# Altium PCB Copy of ProtoStack_H750VBT.PcbDoc
Units mil, origin at the board's own origin, x right, y up, seen from the top; angles counter-clockwise.
Board outline 1259.84 x 4409.45 mil, 3 copper layers (Top Layer, Mid-Layer 2, Bottom Layer); 3 components, 86 nets, 186 pads, 36 vias.
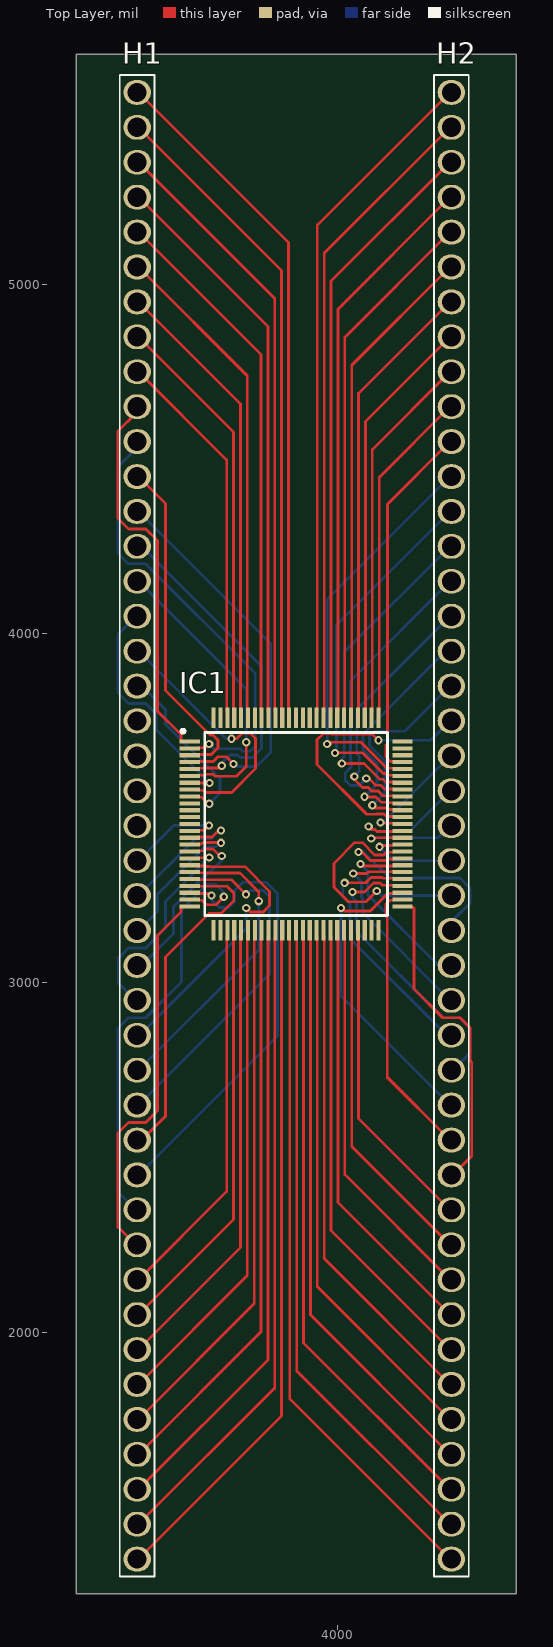
[diagram p0: Top Layer view]
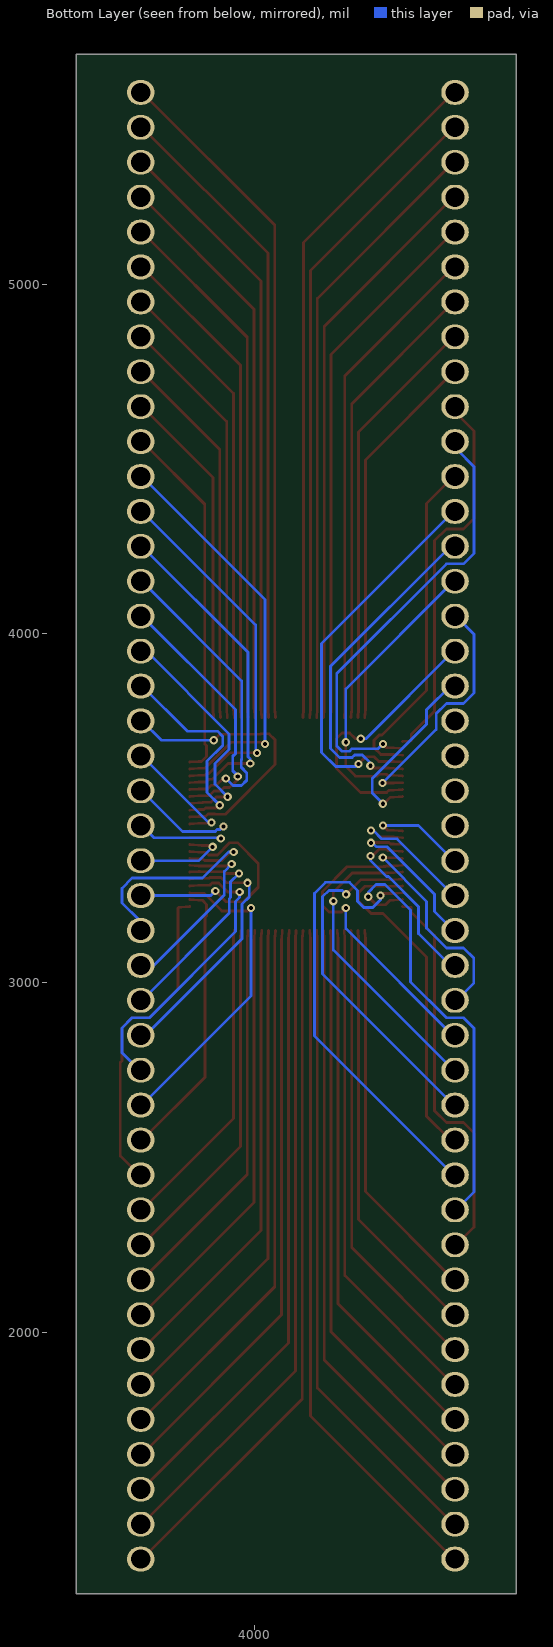
[diagram p1: Bottom Layer view, seen from below]

## Layer stack, top to bottom
Top Solder: solder mask 0.4, Solder Resist, Dk 3.5
Top Layer: signal copper 1.4
Dielectric 1: dielectric 12.6, FR-4, Dk 4.8
Mid-Layer 2: signal copper 1.4
Dielectric2: dielectric 12.6, FR-4, Dk 4.8
Bottom Layer: signal copper 1.4
Bottom Solder: solder mask 0.4, Solder Resist, Dk 3.5

## Board outline
3250.25,1250.25 3250.25,5659.7 4510.09,5659.7 4510.09,1250.25

## Design rules (kind name [scope] priority, off if disabled: settings)
Clearance [All] p1: gap=7 ignorepadtopadclearanceinfootprint=TRUE
PolygonConnect [All] p1: connectstyle=Relief reliefconductorwidth=10 reliefentries=4 polygonreliefangle="90 Angle" airgapwidth=10
RoutingVias [All] p1: holewidth=11.81 width=23.62 viastyle="Through Hole" minholewidth=11.81 minwidth=23.62 maxholewidth=11.81 maxwidth=23.62
SolderMaskExpansion [All] p1: expansion=4 istentingtop=FALSE
Width [All] p1: maxlimit=8 minlimit=8 preferedwidth=8
30 further rules are at their usual default settings.

## Components (designator, comment, footprint, x,y, rotation, side; value= is the part's Value field where it differs from the comment)
H1 "RoundedHeader" HeaderDtack_43 3425,5550 r270 top
H2 "RoundedHeader" HeaderDtack_43 4325,5550 r270 top
IC1 "STM32H750VBT6" QFP50P1600X1600X160-100N 3880.17,3454.97 r0 top

## Footprints (in the part's own frame and the unit in brackets; to place one, negate y for a bottom-side part, rotate by r counter-clockwise, add the part's x,y. Pads: shape width x height; smd on the part's side, far side on the other; paste and mask are expansions set on the pad)
HeaderDtack_43 [mm]
  oval 1.8x2 hole 1.4: 1(0,0) 2(2.54,0) 3(5.08,0) 4(7.62,0) 5(10.16,0) 6(12.7,0) 7(15.24,0) 8(17.78,0) 9(20.32,0) 10(22.86,0) 11(25.4,0) 12(27.94,0) 13(30.48,0) 14(33.02,0) 15(35.56,0) 16(38.1,0) 17(40.64,0) 18(43.18,0) 19(45.72,0) 20(48.26,0) 21(50.8,0) 22(53.34,0) 23(55.88,0) 24(58.42,0) 25(60.96,0) 26(63.5,0) 27(66.04,0) 28(68.58,0) 29(71.12,0) 30(73.66,0) 31(76.2,0) 32(78.74,0) 33(81.28,0) 34(83.82,0) 35(86.36,0) 36(88.9,0) 37(91.44,0) 38(93.98,0) 39(96.52,0) 40(99.06,0) 41(101.6,0) 42(104.14,0) 43(106.68,0)
  silkscreen extent -1.27,-1.27 107.95,1.27
QFP50P1600X1600X160-100N [mm]
  rect 1.475x0.3 smd: 1(-7.738,6) 2(-7.738,5.5) 3(-7.738,5) 4(-7.738,4.5) 5(-7.738,4) 6(-7.738,3.5) 7(-7.738,3) 8(-7.738,2.5) 9(-7.738,2) 10(-7.738,1.5) 11(-7.738,1) 12(-7.738,0.5) 13(-7.738,0) 14(-7.738,-0.5) 15(-7.738,-1) 16(-7.738,-1.5) 17(-7.738,-2) 18(-7.738,-2.5) 19(-7.738,-3) 20(-7.738,-3.5) 21(-7.738,-4) 22(-7.738,-4.5) 23(-7.738,-5) 24(-7.738,-5.5) 25(-7.738,-6) 51(7.738,-6) 52(7.738,-5.5) 53(7.738,-5) 54(7.738,-4.5) 55(7.738,-4) 56(7.738,-3.5) 57(7.738,-3) 58(7.738,-2.5) 59(7.738,-2) 60(7.738,-1.5) 61(7.738,-1) 62(7.738,-0.5) 63(7.738,0) 64(7.738,0.5) 65(7.738,1) 66(7.738,1.5) 67(7.738,2) 68(7.738,2.5) 69(7.738,3) 70(7.738,3.5) 71(7.738,4) 72(7.738,4.5) 73(7.738,5) 74(7.738,5.5) 75(7.738,6)
  rect 0.3x1.475 smd: 26(-6,-7.738) 27(-5.5,-7.738) 28(-5,-7.738) 29(-4.5,-7.738) 30(-4,-7.738) 31(-3.5,-7.738) 32(-3,-7.738) 33(-2.5,-7.738) 34(-2,-7.738) 35(-1.5,-7.738) 36(-1,-7.738) 37(-0.5,-7.738) 38(0,-7.738) 39(0.5,-7.738) 40(1,-7.738) 41(1.5,-7.738) 42(2,-7.738) 43(2.5,-7.738) 44(3,-7.738) 45(3.5,-7.738) 46(4,-7.738) 47(4.5,-7.738) 48(5,-7.738) 49(5.5,-7.738) 50(6,-7.738) 76(6,7.738) 77(5.5,7.738) 78(5,7.738) 79(4.5,7.738) 80(4,7.738) 81(3.5,7.738) 82(3,7.738) 83(2.5,7.738) 84(2,7.738) 85(1.5,7.738) 86(1,7.738) 87(0.5,7.738) 88(0,7.738) 89(-0.5,7.738) 90(-1,7.738) 91(-1.5,7.738) 92(-2,7.738) 93(-2.5,7.738) 94(-3,7.738) 95(-3.5,7.738) 96(-4,7.738) 97(-4.5,7.738) 98(-5,7.738) 99(-5.5,7.738) 100(-6,7.738)
  silkscreen extent -8.35,-6.65 6.65,6.87, body extent -8,-8 8,8, height 1.6

## Part data
H1 H2: library part HeaderStack_43
IC1: "Integrated Circuit", Manufacturer_Name=STMicroelectronics, Mouser Part Number=511-STM32H750VBT6, Arrow Part Number=STM32H750VBT6, Arrow Price/Stock=https://www.arrow.com/en/products/stm32h750vbt6/stmicroelectronics?region=nac, Datasheet Link=https://www.st.com/resource/en/datasheet/stm32h750vb.pdf, Height=1.6mm, Manufacturer_Part_Number=STM32H750VBT6, Mouser Price/Stock=https://www.mouser.co.uk/ProductDetail/STMicroelectronics/STM32H750VBT6?qs=%252BEew9%252B0nqrBAeuu%2FsQQSzQ%3D%3D

## Via types
v1: diameter 23.62, hole 11.81, Top Layer to Bottom Layer, 36 vias

## Nets (pads, with @x,y where several pads share a name; then routed paths per layer and width w, separated by ;. In a path a pad name is that pad's centre, name@x,y a point inside that pad or via, vN(x,y) a via of type N, cw(c..) or ccw(c..) an arc to the next point about the centre after c; other vN are vias at no path point)
NetC1_1: IC1.73
NetC2_2: 
NetC3_2: 
NetC4_2: IC1.48
NetH1_1: H1.1 IC1.89 | length 1972.4
  Top Layer w8: H1.1 3428.94,5550 3858.58,5120.35 3858.58,3788.65 3858.58,3784.65 IC1.89
NetH1_2: H1.2 IC1.90 | length 1864.2
  Top Layer w8: H1.2 3428.94,5450 3838.9,5040.04 3838.9,3788.65 3838.9,3784.65 IC1.90
NetH1_3: H1.3 IC1.91 | length 1756
  Top Layer w8: H1.3 3428.94,5350 3819.21,4959.72 3819.21,3788.65 3819.21,3784.65 IC1.91
NetH1_4: H1.4 IC1.92 | length 1647.9
  Top Layer w8: H1.4 3428.94,5250 3799.53,4879.41 3799.53,3788.65 3799.53,3784.65 IC1.92
NetH1_5: H1.5 IC1.93 | length 1539.7
  Top Layer w8: H1.5 3428.94,5150 3779.84,4799.09 3779.84,3788.65 3779.84,3784.65 IC1.93
NetH1_6: H1.6 IC1.95 | length 1423.4
  Top Layer w8: H1.6 3428.94,5050 3740.47,4738.46 3740.47,3788.65 3740.47,3784.65 IC1.95
NetH1_7: H1.7 IC1.96 | length 1315.3
  Top Layer w8: H1.7 3428.94,4950 3720.79,4658.15 3720.79,3788.65 3720.79,3784.65 IC1.96
NetH1_8: H1.8 IC1.97 | length 1207.1
  Top Layer w8: H1.8 3428.94,4850 3701.1,4577.83 3701.1,3788.65 3701.1,3784.65 IC1.97
NetH1_9: H1.9 IC1.98 | length 1099
  Top Layer w8: H1.9 3428.94,4750 3681.42,4497.52 3681.42,3788.65 3681.42,3784.65 IC1.98
NetH1_10: H1.10 IC1.1 | length 1110.3
  Top Layer w8: 3370.57,4401.68 3370.57,4477.92 ; 3370.57,4501.68 3370.57,4580.42 3421.06,4630.91 3421.06,4650 H1.10 ; 3370.59,4401.67 3370.59,4329.76 3400.35,4300 3449.65,4300 3483.37,4266.28 3483.37,3777.85 3550.49,3710.73 3550.49,3697.1 3550.49,3693.1 IC1.1 ; 3370.59,4477.93 3370.59,4501.67
NetH1_11: H1.11 IC1.2 | length 1295.5
  Top Layer w8: IC1.2 3600.56,3673.41 3604.56,3673.41 3620.58,3673.41 v1(3631.24,3684.07)
  Bottom Layer w8: 3370.57,4328.3 3370.57,4375.42 ; 3370.57,4401.68 3370.57,4477.92 3421.06,4528.41 3421.06,4550 H1.11 ; 3370.59,4328.28 3370.59,4229.76 3400.35,4200 3449.65,4200 3763.56,3886.09 3763.56,3678.46 3748.39,3663.3 3726.95,3663.3 3719.58,3670.66 3644.65,3670.66 v1(3631.24,3684.07) ; 3370.59,4375.44 3370.59,4401.67
NetH1_12: H1.12 IC1.3 | length 969.6
  Top Layer w8: H1.12 3428.94,4450 3506.37,4372.57 3506.37,3837.31 3633.79,3709.89 3641.93,3709.89 3657.06,3694.76 3657.06,3673.38 3637.41,3653.73 3604.56,3653.73 3600.56,3653.73 IC1.3
NetH1_13: H1.13 IC1.4 | length 1116.8
  Top Layer w8: IC1.4 3600.56,3634.04 3604.56,3634.04 3643.18,3634.04 3656.74,3647.6 3680.48,3647.6 v1(3701.37,3626.7)
  Bottom Layer w8: H1.13 3428.94,4350 3807.52,3971.42 3807.52,3660.25 3766.6,3619.34 3708.74,3619.34 v1(3701.37,3626.7)
NetH1_14: H1.14 IC1.5 | length 974.8
  Top Layer w8: IC1.5 3600.56,3614.36 3604.56,3614.36 3614.2,3614.36 3614.78,3614.94 3660.59,3614.94 v1(3667.43,3621.79)
  Bottom Layer w8: H1.14 3428.94,4250 3438.44,4250 3781.63,3906.82 3781.63,3670.97 3755.88,3645.22 3719.46,3645.22 3712.09,3652.59 3690.65,3652.59 3667.43,3629.37 v1(3667.43,3621.79)
NetH1_15: H1.15 IC1.6 | length 839.5
  Top Layer w8: IC1.6 3600.56,3594.67 3604.56,3594.67 3619.15,3594.67 3622,3597.52 3642.7,3597.52 3648.25,3591.97 3710.22,3591.97 3737.67,3619.43 v1(3737.67,3689.18)
  Bottom Layer w8: H1.15 3428.94,4150 3737.67,3841.26 v1(3737.67,3689.18)
NetH1_16: H1.16 IC1.7 | length 696.4
  Top Layer w8: IC1.7 3600.56,3572.54 3604.56,3572.54 v1(3632.35,3572.54)
  Bottom Layer w8: 3370.57,3918.3 3370.57,3998.32 3421.06,4048.81 3421.06,4050 H1.16 ; 3370.59,3918.28 3370.59,3829.76 3400.35,3800 3449.65,3800 3478.94,3770.71 3478.94,3725.95 v1(3632.35,3572.54)
NetH1_17: H1.17 IC1.8 | length 763.1
  Top Layer w8: IC1.8 3600.56,3551.49 3604.56,3551.49 3614.37,3551.49 3620.69,3545.17 3695.94,3545.17 3764.28,3613.51 3764.28,3700.2 3748.69,3715.79 3726.65,3715.79 3709.82,3698.95 v1(3695.02,3698.95)
  Bottom Layer w8: H1.17 3428.94,3950 3679.99,3698.95 v1(3695.02,3698.95)
NetH1_18: H1.18 IC1.9 | length 520
  Top Layer w8: IC1.9 3600.56,3531.81 3604.56,3531.81 3609.48,3531.81 3628.5,3512.79 v1(3631.67,3512.79)
  Bottom Layer w8: H1.18 3428.94,3850 3438.44,3850 3506.37,3782.07 3506.37,3740.68 3662.16,3584.89 3662.16,3543.29 v1(3631.67,3512.79)
NetH1_23: H1.23 IC1.14 | length 309.4
  Top Layer w8: IC1.14 3600.56,3437.19 3604.56,3437.19 3617.52,3437.19 v1(3631.2,3450.88)
  Bottom Layer w8: H1.23 3428.94,3350 3529.82,3450.88 v1(3631.2,3450.88)
NetH1_24: H1.24 IC1.15 | length 415.1
  Top Layer w8: IC1.15 3600.56,3417.51 3604.56,3417.51 3639.91,3417.51 3658.82,3436.43 v1(3665.25,3436.43)
  Bottom Layer w8: H1.24 3428.94,3250 3591.49,3412.55 3634.95,3412.55 3658.82,3436.43 v1(3665.25,3436.43)
NetH1_25: H1.25 IC1.16 | length 465.6
  Top Layer w8: IC1.16 3600.56,3397.82 3604.56,3397.82 3609.49,3397.82 3613.75,3402.09 3664.31,3402.09 v1(3665.43,3400.96)
  Bottom Layer w8: H1.25 3428.94,3150 3483.37,3204.43 3483.37,3253.98 3618.94,3389.55 3649.77,3389.55 3661.18,3400.96 v1(3665.43,3400.96)
NetH1_26: H1.26 IC1.17 | length 526.8
  Top Layer w8: IC1.17 3600.56,3378.14 3604.56,3378.14 3616.24,3378.14 3621.49,3383.39 3641.92,3383.39 3661.89,3363.42 v1(3667.21,3363.42)
  Bottom Layer w8: H1.26 3428.94,3050 3438.44,3050 3529.37,3140.93 3529.37,3217.91 3615.8,3304.34 3620.88,3304.34 3667.21,3350.67 v1(3667.21,3363.42)
NetH1_27: H1.27 IC1.18 | length 626.6
  Top Layer w8: IC1.18@3575.53,3356.55 3600.56,3358.45 3604.56,3358.45 3631.42,3358.45 v1(3631.7,3358.74)
  Bottom Layer w8: H1.27 3421.06,2950 3371.06,3000 3371.06,3070.71 3400.35,3100 3449.65,3100 3506.37,3156.72 3506.37,3233.41 v1(3631.7,3358.74)
NetH1_28: H1.28 IC1.19 | length 876.9
  Top Layer w8: IC1.19 3600.56,3334.96 3604.56,3334.96 3622.53,3334.96 3624.29,3333.2 3629.95,3333.2 3630.39,3332.76 3733.56,3332.76 3804.28,3262.04 3804.28,3221.33 3786.23,3203.29 3748.99,3203.29 v1(3737.66,3214.62)
  Bottom Layer w8: H1.28 3428.94,2850 3432.17,2850 3737.66,3155.48 v1(3737.66,3214.62)
NetH1_29: H1.29 IC1.20 | length 877.7
  Top Layer w8: IC1.20 3600.56,3315.27 3604.56,3315.27 3617.63,3315.27 3618.32,3314.59 3719.2,3314.59 3773.47,3260.32 v1(3773.47,3234.1)
  Bottom Layer w8: H1.29 3428.94,2750 3773.47,3094.53 v1(3773.47,3234.1)
NetH1_30: H1.30 IC1.21 | length 1014.7
  Top Layer w8: IC1.21 3600.56,3295.59 3604.56,3295.59 3694.63,3295.59 v1(3736.63,3253.59)
  Bottom Layer w8: H1.30 3428.94,2650 3804.28,3025.34 3804.28,3246.86 3786.23,3264.91 3747.95,3264.91 v1(3736.63,3253.59)
NetH1_31: H1.31 IC1.22 | length 984.2
  Top Layer w8: H1.31 3428.94,2550 3438.44,2550 3506.37,2617.93 3506.37,3073.78 3630.95,3198.36 3664.97,3198.36 3701.47,3234.86 3701.47,3258.11 3682.73,3276.86 3604.56,3276.86 3600.56,3276.86 IC1.22
NetH1_32: H1.32 IC1.23 | length 1312.3
  Top Layer w8: IC1.23 3600.56,3256.22 3604.56,3256.22 3632.39,3256.22 v1(3638.08,3250.53)
  Bottom Layer w8: H1.32 3428.94,2450 3827.28,2848.34 3827.28,3256.39 3795.76,3287.91 3727.38,3287.91 3704.21,3264.74 3704.21,3233.72 3686.17,3215.68 3660.64,3215.68 3638.08,3238.23 v1(3638.08,3250.53)
NetH1_33: H1.33 IC1.24 | length 1273.1
  Top Layer w8: IC1.24 3600.56,3236.53 3604.56,3236.53 3611.14,3236.53 3624.04,3223.63 3650.54,3223.63 v1(3673.4,3246.49)
  Bottom Layer w8: 3370.57,2479.09 3370.57,2401.68 3421.06,2351.19 3421.06,2350 H1.33 ; 3370.57,2501.68 3370.57,2581.59 ; 3370.57,2601.68 3370.57,2684.1 ; 3370.57,2701.68 3370.57,2786.6 ; 3370.59,2479.11 3370.59,2501.67 ; 3370.59,2581.61 3370.59,2601.67 ; 3370.59,2684.11 3370.59,2701.67 ; 3370.59,2786.62 3370.59,2870.24 3400.35,2900 3449.65,2900 3552.37,3002.72 3552.37,3208.39 3625.32,3281.34 3650.85,3281.34 3673.4,3258.78 v1(3673.4,3246.49)
NetH1_34: H1.34 IC1.25 | length 1120.2
  Top Layer w8: 3370.57,2376.59 3370.57,2300.49 3421.06,2250 H1.34 ; 3370.57,2401.68 3370.57,2479.09 ; 3370.59,2376.6 3370.59,2401.67 ; 3370.59,2479.11 3370.59,2570.24 3400.35,2600 3449.65,2600 3483.37,2633.72 3483.37,3136.17 3550.49,3203.29 3550.49,3212.85 3550.49,3216.85 IC1.25
NetH1_35: H1.35 IC1.28 | length 1108.9
  Top Layer w8: H1.35 3428.94,2150 3681.42,2402.48 3681.42,3121.29 3681.42,3125.29 IC1.28
NetH1_36: H1.36 IC1.29 | length 1217.1
  Top Layer w8: H1.36 3428.94,2050 3701.1,2322.17 3701.1,3121.29 3701.1,3125.29 IC1.29
NetH1_37: H1.37 IC1.30 | length 1325.2
  Top Layer w8: H1.37 3428.94,1950 3720.79,2241.85 3720.79,3121.29 3720.79,3125.29 IC1.30
NetH1_38: H1.38 IC1.31 | length 1433.4
  Top Layer w8: H1.38 3428.94,1850 3740.47,2161.54 3740.47,3121.29 3740.47,3125.29 IC1.31
NetH1_39: H1.39 IC1.32 | length 1541.5
  Top Layer w8: H1.39 3428.94,1750 3760.16,2081.22 3760.16,3121.29 3760.16,3125.29 IC1.32
NetH1_40: H1.40 IC1.33 | length 1649.7
  Top Layer w8: H1.40 3428.94,1650 3779.84,2000.91 3779.84,3121.29 3779.84,3125.29 IC1.33
NetH1_41: H1.41 IC1.34 | length 1757.8
  Top Layer w8: H1.41 3428.94,1550 3799.53,1920.59 3799.53,3121.29 3799.53,3125.29 IC1.34
NetH1_42: H1.42 IC1.35 | length 1866
  Top Layer w8: H1.42 3428.94,1450 3819.21,1840.28 3819.21,3121.29 3819.21,3125.29 IC1.35
NetH1_43: H1.43 IC1.36 | length 1974.1
  Top Layer w8: H1.43 3428.94,1350 3838.9,1759.96 3838.9,3121.29 3838.9,3125.29 IC1.36
NetH2_1: H2.1 IC1.85 | length 1951.8
  Top Layer w8: IC1.85 3941.13,3784.65 3941.13,3788.65 3941.13,5170.07 4321.06,5550 H2.1
NetH2_2: H2.2 IC1.84 | length 1843.6
  Top Layer w8: IC1.84 3960.82,3784.65 3960.82,3788.65 3960.82,5089.76 4321.06,5450 H2.2
NetH2_3: H2.3 IC1.83 | length 1735.5
  Top Layer w8: IC1.83 3980.5,3784.65 3980.5,3788.65 3980.5,5009.44 4321.06,5350 H2.3
NetH2_4: H2.4 IC1.82 | length 1627.3
  Top Layer w8: IC1.82 4000.19,3784.65 4000.19,3788.65 4000.19,4929.13 4321.06,5250 H2.4
NetH2_5: H2.5 IC1.81 | length 1519.1
  Top Layer w8: IC1.81 4019.87,3784.65 4019.87,3788.65 4019.87,4848.81 4321.06,5150 H2.5
NetH2_6: H2.6 IC1.80 | length 1411
  Top Layer w8: IC1.80 4039.56,3784.65 4039.56,3788.65 4039.56,4768.5 4321.06,5050 H2.6
NetH2_7: H2.7 IC1.79 | length 1302.8
  Top Layer w8: IC1.79 4059.24,3784.65 4059.24,3788.65 4059.24,4688.18 4321.06,4950 H2.7
NetH2_8: H2.8 IC1.78 | length 1194.7
  Top Layer w8: IC1.78 4078.93,3784.65 4078.93,3788.65 4078.93,4607.87 4321.06,4850 H2.8
NetH2_9: H2.9 IC1.77 | length 1086.5
  Top Layer w8: IC1.77 4098.61,3784.65 4098.61,3788.65 4098.61,4527.55 4321.06,4750 H2.9
NetH2_10: H2.10 IC1.76 | length 978.4
  Top Layer w8: IC1.76 4118.3,3784.65 4118.3,3788.65 4118.3,4447.24 4321.06,4650 H2.10
NetH2_11: H2.11 IC1.72 | length 1036.1
  Top Layer w8: IC1.72 4159.78,3634.04 4155.78,3634.04 4150.87,3634.04 4136.78,3648.13 4136.78,3679.22 4141.78,3684.22 4141.78,4370.72 4321.06,4550 H2.11
NetH2_12: H2.12 IC1.71 | length 1164.2
  Top Layer w8: v1(3969.27,3684.06) 3974.17,3688.95 4066.39,3688.95 4140.8,3614.55 4142.52,3614.55 4142.71,3614.36 4155.78,3614.36 4159.78,3614.36 IC1.71
  Bottom Layer w8: v1(3969.27,3684.06) 3969.27,4098.2 4321.06,4450 H2.12
NetH2_13: H2.13 IC1.70 | length 1051.7
  Top Layer w8: v1(3992.01,3658.33) 3992.65,3658.96 4070.37,3658.96 4129.72,3599.62 4136.33,3599.62 4141.28,3594.67 4155.78,3594.67 4159.78,3594.67 IC1.70
  Bottom Layer w8: v1(3992.01,3658.33) 3995.8,3662.12 3995.8,4024.74 4321.06,4350 H2.13
NetH2_14: H2.14 IC1.69 | length 949.8
  Top Layer w8: v1(4011.25,3628.15) 4075.18,3628.15 4120.45,3582.88 4129.4,3582.88 4137.3,3574.99 4155.78,3574.99 4159.78,3574.99 IC1.69
  Bottom Layer w8: v1(4011.25,3628.15) 4011.25,3640.99 4017.88,3647.61 4017.88,3946.82 4321.06,4250 H2.14
NetH2_15: H2.15 IC1.68 | length 889.6
  Top Layer w8: v1(4081.22,3585.05) 4088.7,3585.05 4107.61,3566.15 4122.47,3566.15 4133.31,3555.3 4155.78,3555.3 4159.78,3555.3 IC1.68
  Bottom Layer w8: v1(4081.22,3585.05) 4061.14,3564.96 4036.35,3564.96 4021.2,3580.11 4021.2,3601.54 4037.11,3617.44 4037.11,3638.86 4035.94,3640.04 4035.94,3864.87 4321.06,4150 H2.15
NetH2_16: H2.16 IC1.67 | length 748.3
  Top Layer w8: v1(4047.06,3590.82) 4047.06,3582.49 4070.47,3559.09 4086.89,3559.09 4096.57,3549.41 4115.54,3549.41 4129.33,3535.62 4155.78,3535.62 4159.78,3535.62 IC1.67
  Bottom Layer w8: v1(4047.06,3590.82) 4047.06,3593.15 4061.32,3607.41 4061.32,3648.89 4053.99,3656.22 4053.99,3782.93 4321.06,4050 H2.16
NetH2_17: H2.17 IC1.66 | length 678.4
  Top Layer w8: v1(4076.13,3533.13) 4076.58,3532.68 4108.61,3532.68 4123.83,3517.45 4146.24,3517.45 4147.76,3515.93 4155.78,3515.93 4159.78,3515.93 IC1.66
  Bottom Layer w8: v1(4076.13,3533.13) 4112.04,3569.03 4112.04,3628.05 4072.05,3668.04 4072.05,3713.11 4308.94,3950 4321.06,3950 H2.17
NetH2_18: H2.18 IC1.65 | length 616.7
  Top Layer w8: v1(4098.67,3508.68) 4106.79,3500.55 4139.24,3500.55 4143.55,3496.25 4155.78,3496.25 4159.78,3496.25 IC1.65
  Bottom Layer w8: v1(4098.67,3508.68) 4135.04,3545.05 4135.04,3634.93 4090.11,3679.86 4090.11,3705.63 4105.26,3720.78 4191.85,3720.78 4321.06,3850 H2.18
NetH2_19: H2.19 IC1.64 | length 800
  Top Layer w8: v1(4115.97,3694.92) 4099.12,3711.77 3982.81,3711.77 3981.35,3713.22 3957.18,3713.22 3940.1,3696.14 3940.1,3625.59 4082.75,3482.94 4111.46,3482.94 4112.17,3483.65 4132.24,3483.65 4139.33,3476.56 4155.78,3476.56 4159.78,3476.56 IC1.64
  Bottom Layer w8: v1(4115.97,3694.92) 4265.98,3694.92 4321.06,3750 H2.19
NetH2_20: H2.20 IC1.63 | length 345.5
  Top Layer w8: v1(4122.2,3459.42) 4124.74,3456.88 4155.78,3456.88 4159.78,3456.88 IC1.63
  Bottom Layer w8: v1(4122.2,3459.42) 4130.48,3459.42 4321.06,3650 H2.20
NetH2_21: H2.21 IC1.62 | length 393.4
  Top Layer w8: v1(4088.11,3447.98) 4096.75,3439.34 4106.15,3439.34 4111.62,3433.87 4155.78,3433.87 4159.78,3433.87 IC1.62
  Bottom Layer w8: v1(4088.11,3447.98) 4096.75,3439.34 4106.15,3439.34 4111.62,3433.87 4204.94,3433.87 4321.06,3550 H2.21
NetH2_22: H2.22 IC1.61 | length 334.4
  Top Layer w8: v1(4095.57,3413.8) 4097.26,3415.48 4155.78,3415.48 4159.78,3415.48 IC1.61
  Bottom Layer w8: v1(4095.57,3413.8) 4097.26,3415.48 4286.55,3415.48 4321.06,3450 H2.22
NetH2_23: H2.23 IC1.60 | length 290.3
  Top Layer w8: v1(4119.02,3389.61) 4122.59,3393.18 4134.56,3393.18 4134.8,3393.43 4134.91,3393.32 4142.53,3393.32 4142.86,3393.65 4143.01,3393.5 4150.36,3393.5 4150.87,3394.01 4155.78,3394.01 4159.78,3394.01 IC1.60
  Bottom Layer w8: v1(4119.02,3389.61) 4158.63,3350 4321.06,3350 H2.23
NetH2_24: H2.24 IC1.59 | length 678.9
  Top Layer w8: v1(4111.36,3263) 4080.79,3232.43 4030.29,3232.43 4020.48,3242.24 4019.98,3242.24 3988.45,3273.77 3988.45,3342.19 4047.8,3401.54 4069.97,3401.54 4104.98,3366.54 4131.17,3366.54 4138.15,3373.52 4141.91,3373.52 4142.71,3374.33 4155.78,3374.33 4159.78,3374.33 IC1.59
  Bottom Layer w8: v1(4111.36,3263) 4124.36,3250 4321.06,3250 H2.24
NetH2_25: H2.25 IC1.58 | length 646.3
  Top Layer w8: v1(4058.89,3374.78) 4068.46,3374.78 4092.79,3350.44 4142.48,3350.44 4146.18,3354.15 4150.37,3354.15 4150.87,3354.64 4155.78,3354.64 4159.78,3354.64 IC1.58@4184.82,3356.55
  Bottom Layer w8: v1(4058.89,3374.78) 4073.82,3374.78 4148.59,3300 4349.65,3300 4378.94,3270.71 4378.94,3229.29 4328.94,3179.29 4328.94,3150 H2.25
NetH2_26: H2.26 IC1.57 | length 543
  Top Layer w8: v1(4064.65,3340.37) 4070.67,3334.35 4155.18,3334.35 4155.78,3334.96 4159.78,3334.96 IC1.57
  Bottom Layer w8: v1(4064.65,3340.37) 4085.55,3319.47 4085.55,3252.31 4287.85,3050 4321.06,3050 H2.26
NetH2_27: H2.27 IC1.56 | length 625.7
  Top Layer w8: v1(4043.81,3313.49) 4083.7,3313.49 4088.47,3318.26 4154.96,3318.26 4155.78,3319.08 4159.78,3319.08 IC1.56
  Bottom Layer w8: v1(4043.81,3313.49) 4067.55,3289.75 4067.55,3244.32 4071.41,3240.46 4071.41,3199.65 4321.06,2950 H2.27
NetH2_28: H2.28 IC1.55 | length 748.6
  Top Layer w8: v1(4019.26,3286.53) 4019.5,3286.77 4079.74,3286.77 4095.14,3302.17 4127.59,3302.17 4130.35,3299.4 4155.78,3299.4 4159.78,3299.4 IC1.55
  Bottom Layer w8: v1(4019.26,3286.53) 4014.12,3281.39 4014.12,3246.31 4035.04,3225.39 4035.04,3126.52 4311.56,2850 4321.06,2850 H2.28
NetH2_29: H2.29 IC1.54 | length 859.8
  Top Layer w8: v1(4041.73,3260.04) 4075.77,3260.04 4101.8,3286.07 4120.92,3286.07 4127.28,3279.71 4155.78,3279.71 4159.78,3279.71 IC1.54
  Bottom Layer w8: v1(4041.73,3260.04) 4041.73,3244.42 4053.23,3232.93 4053.23,3147.12 4300.35,2900 4349.65,2900 4378.94,2870.71 4378.94,2800 4328.94,2750 H2.29
NetH2_30: H2.30 IC1.53 | length 897.8
  Top Layer w8: v1(4009.04,3214.62) 4017.43,3206.23 4092.73,3206.23 4142.71,3256.22 4155.78,3256.22 4159.78,3256.22 IC1.53
  Bottom Layer w8: v1(4009.04,3214.62) 4009.04,2962.02 4321.06,2650 H2.30
NetH2_31: H2.31 IC1.52 | length 808
  Top Layer w8: IC1.52 4159.78,3236.53 4155.78,3236.53 4148.6,3236.53 4136.78,3224.72 4136.78,3191.75 4141.3,3187.23 4141.3,2729.76 4321.06,2550 H2.31
NetH2_32: H2.32 IC1.51 | length 922.5
  Top Layer w8: IC1.51 4209.85,3216.85 4213.85,3216.85 4215.51,3216.85 4217.85,3214.5 4217.85,2982.5 4300.35,2900 4349.65,2900 4378.94,2870.71 4378.94,2776.98 4383.37,2772.55 4383.37,2504.43 4328.94,2450 H2.32
NetH2_33: H2.33 IC1.47 | length 912.8
  Top Layer w8: IC1.47 4059.24,3125.29 4059.24,3121.29 4059.24,2611.82 4321.06,2350 H2.33
NetH2_34: H2.34 IC1.46 | length 1020.9
  Top Layer w8: IC1.46 4039.56,3125.29 4039.56,3121.29 4039.56,2531.5 4321.06,2250 H2.34
NetH2_35: H2.35 IC1.45 | length 1129.1
  Top Layer w8: IC1.45 4019.87,3125.29 4019.87,3121.29 4019.87,2451.19 4321.06,2150 H2.35
NetH2_36: H2.36 IC1.44 | length 1237.2
  Top Layer w8: IC1.44 4000.19,3125.29 4000.19,3121.29 4000.19,2370.87 4321.06,2050 H2.36
NetH2_37: H2.37 IC1.43 | length 1345.4
  Top Layer w8: IC1.43 3980.5,3125.29 3980.5,3121.29 3980.5,2290.56 4321.06,1950 H2.37
NetH2_38: H2.38 IC1.42 | length 1453.6
  Top Layer w8: IC1.42 3960.82,3125.29 3960.82,3121.29 3960.82,2210.24 4321.06,1850 H2.38
NetH2_39: H2.39 IC1.41 | length 1561.7
  Top Layer w8: IC1.41 3941.13,3125.29 3941.13,3121.29 3941.13,2129.93 4321.06,1750 H2.39
NetH2_40: H2.40 IC1.40 | length 1669.9
  Top Layer w8: IC1.40 3921.45,3125.29 3921.45,3121.29 3921.45,2049.61 4321.06,1650 H2.40
NetH2_41: H2.41 IC1.39 | length 1778
  Top Layer w8: IC1.39 3901.76,3125.29 3901.76,3121.29 3901.76,1969.3 4321.06,1550 H2.41
NetH2_42: H2.42 IC1.38 | length 1886.2
  Top Layer w8: IC1.38 3882.08,3125.29 3882.08,3121.29 3882.08,1888.98 4321.06,1450 H2.42
NetH2_43: H2.43 IC1.37 | length 1994.3
  Top Layer w8: IC1.37 3862.39,3125.29 3862.39,3121.29 3862.39,1808.67 4321.06,1350 H2.43
pads on no net: H1.19 H1.20 H1.21 H1.22 IC1.10 IC1.11 IC1.12 IC1.13 IC1.26 IC1.27 IC1.49 IC1.50 IC1.74 IC1.75 IC1.86 IC1.87 IC1.88 IC1.94 IC1.99 IC1.100

## Silkscreen, mask and mechanical layers (free items; w line width, h text height)
Draft:
  lines w0.5: 3250.25,1250.25 3250.25,5659.7 4510.09,5659.7 4510.09,1250.25 3250.25,1250.25 ; 3407.73,1525.84 3407.73,5384.11 4352.61,5384.11 4352.61,1525.84 3407.73,1525.84
  lines w1.97: 3425,1350 3425,5550 ; 4325,1350 4325,5550
  lines w5: 3250.25,3454.97 4510.09,3454.97 ; 3880.17,1250.25 3880.17,5659.7